# EAGLE board single layer_rectangle (EAGLE 6.5.0)
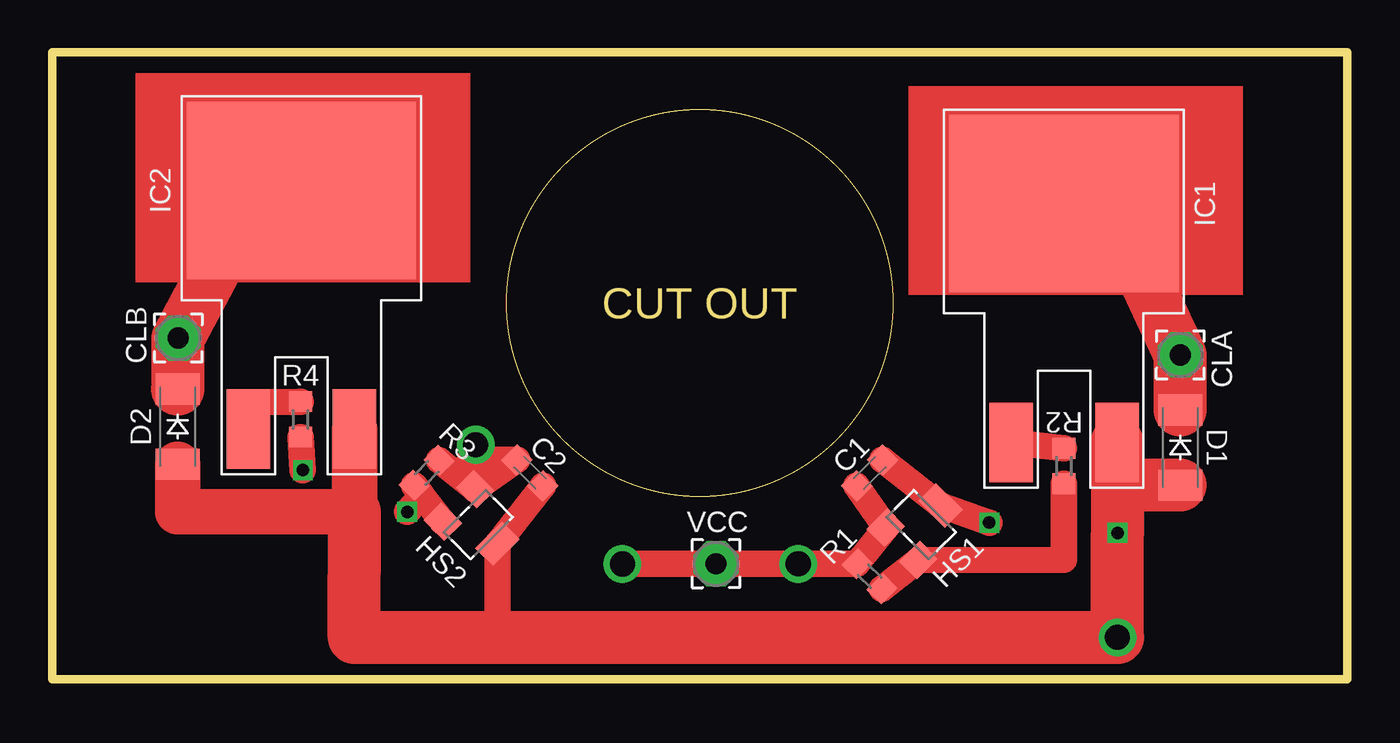
[diagram p0: board, top side]
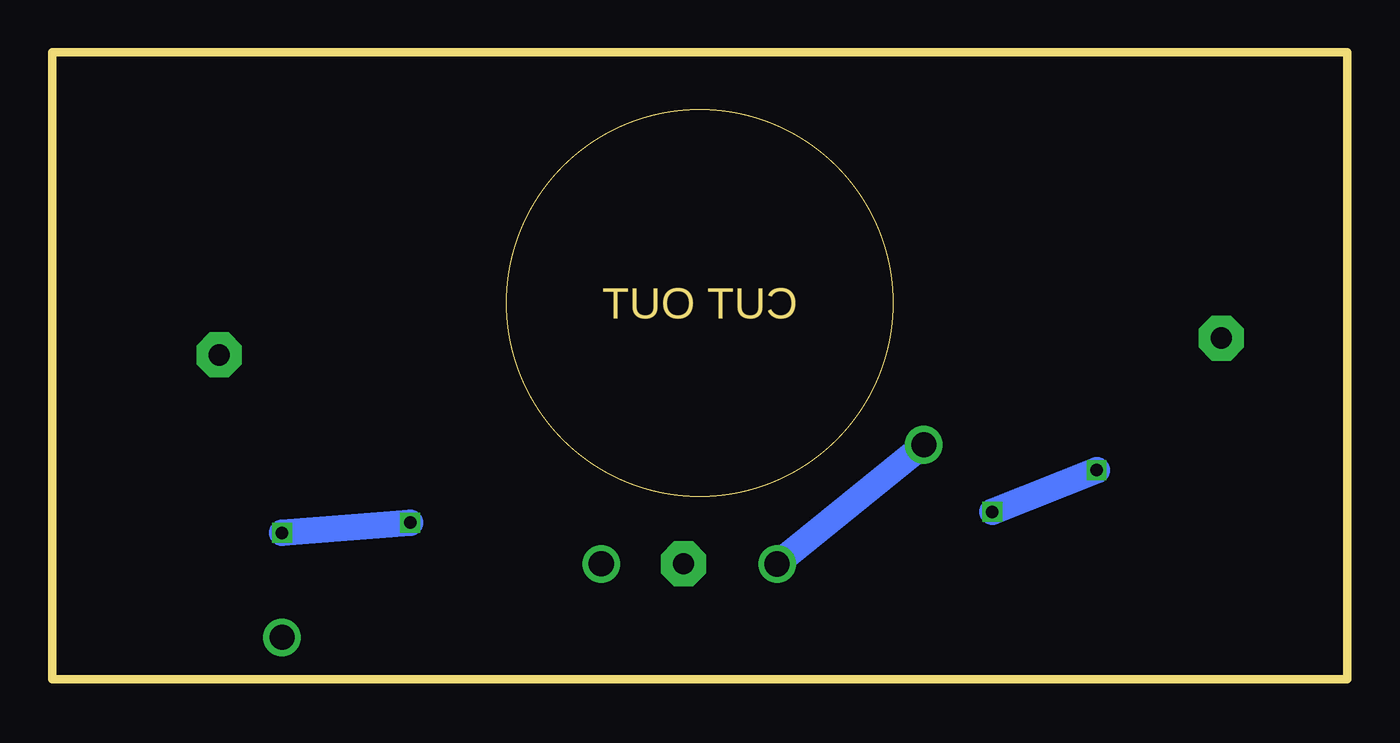
[diagram p1: board, bottom side, seen from below]

Size 62 x 30 mm. Coordinates in mm from the lower left corner, seen from the top.
Outline: 2,30 60,30
Outline: 56,0 3,0
Outline: 0,30 62,30 62,0 0,0 0,30
Outline: circle at 31,18 radius 9.25
Copper layers (1*16): Top 0.0356mm / dielectric 1.5011mm / Bottom 0.0356mm
Design rules "OSHPark8mildruTentedVias": minimum track width 8mil, minimum drill 13mil, track to track 8mil, track to pad 8mil, pad to pad 8mil, via to via 8mil, smd to smd 6mil, copper to edge 15mil, drill to drill 6mil, minimum pad ring 7mil, minimum via ring 7mil, stop-mask expansion 3mil, vias tented up to drill 16mil, thermal gap 10mil

## Footprints (pad centres in the part's own frame; a part is rotated, then mirrored left to right if it is on the bottom)
C0603K = smd 1.05 x 1.08: 1 -0.875,0; 2 0.875,0
2,15/1,0 = drill 1.016 pad 2.159 octagon: 1 0,0
SOD-123_MINI-SMA = smd 1.5 x 2.1: A 1.8,0; C -1.8,0
SOT23-W = smd 1.2 x 1.4: 1 -1.1,-1.3; 2 1.1,-1.3 | smd 1.8 x 1.2: 3 0,1.3
TO-263AB = smd 11 x 8.5: P$1 0,0 | smd 2.08 x 3.81: P$2 -2.54,-11.43; P$3 2.54,-11.43
R0603 = smd 1 x 1.1: 1 -0.85,0; 2 0.85,0

## Placement (x,y rotation side)
C1  .1uF  [C0603K]  39.13,9.87 45 top
C2  .1uF  [C0603K]  22.87,9.87 315 top
CLA  WIREPAD2,15/1,0  [2,15/1,0]  54,15.52 270 top
CLB  WIREPAD2,15/1,0  [2,15/1,0]  6.03,16.32 90 top
D1  CGRM4007-G  [SOD-123_MINI-SMA]  54,11.08 270 top
D2  CGRM4007-G  [SOD-123_MINI-SMA]  6,12.08 270 top
HS1  AH175  [SOT23-W]  41.61,7.39 315 top
HS2  AH175  [SOT23-W]  20.39,7.39 225 top
IC1  IRGS14C40LPBF  [TO-263AB]  48.44,22.76 0 top
IC2  IRGS14C40LPBF  [TO-263AB]  11.93,23.39 0 top
R1  10K  [R0603]  39.13,4.92 315 top
R2  2K2  [R0603]  48.44,10.2 90 top
R3  10K  [R0603]  17.92,9.87 225 top
R4  2K2  [R0603]  11.89,12.43 90 top
VCC  WIREPAD2,15/1,0  [2,15/1,0]  31.77,5.52 0 top

## Library data of the parts
C1 C2 R1-R4 = adafruit
CLA CLB VCC = wirepad
D1 D2 = diode
HS1 HS2 = allegro; MF: ALLEGRO MICROSYSTEMS, INC.; MPN: A1301ELHLT-T; OC_FARNELL: 1198084; OC_NEWARK: 31K6634
IC1 IC2 = My Library

## Nets
G1: IC1.P$2 R2.2
G2: IC2.P$2 R4.2
GND: C1.2 C2.2 D1.A D2.A HS1.3 HS2.3 IC1.P$3 IC2.P$3
LHS: CLB.1 D2.C IC2.P$1
N$3: HS1.2 R1.2 R2.1
N$8: HS2.2 R3.2 R4.1
RHS: CLA.1 D1.C IC1.P$1
VCC: C1.1 C2.1 HS1.1 HS2.1 R1.1 R3.1 VCC.1

## Tracks (layer width: path | path; a pad name or v marks a point on that pad's centre or on a via)
G1
  Top 1.27: R2.2 IC1.P$2
G2
  Top 1.27: R4.2 9.65,13.26 IC2.P$2
GND  (via drill 0.6, 1.2)
  Top 1.27: C2.2 HS2.3 21.31,2 21,2 | C1.2 HS1.3 v44.86,7.49
  Top 2.184: D2.A 6,8 14.47,8 IC2.P$3
  Top 2.54: D1.A 50.98,9.28 IC1.P$3 v51,7 v51,2 21,2 14.46,2 14.47,8
  Bottom 1.27: v51,7 v44.86,7.49
LHS
  Top 2.54: D2.C 6.03,13.88 CLB.1 8,20 IC2.P$1
N$1  (via drill 0.6)
  other vias: 12,10
N$2  (via drill 0.6)
  other vias: 51,7
N$3
  Top 1.27: R1.2 HS1.2 48.44,5.71 R2.1
N$4  (via drill 1.2)
  other vias: 35.71,5.52
N$8  (via drill 0.6)
  Top 1.27: HS2.2 17.71,8.77 | 17.71,8.77 R3.2 | R4.1 v12,10 | v17,8 17.71,8.77
  Bottom 1.27: v12,10 v17,8
RHS
  Top 2.54: D1.C CLA.1 51,22 IC1.P$1
VCC  (via drill 1.2)
  Top 1.27: R3.1 HS2.1 C2.1 20,10.49 v20.27,11.22 | C1.1 HS1.1 R1.1 VCC.1 v27.3,5.51
  Bottom 1.27: v20.27,11.22 v27.3,5.51
(copper drawn outside any net)
  shapes: Top area x2

## Text on the board
Dimension: CUT OUT